# EAGLE board C6 (EAGLE 7.5.0)
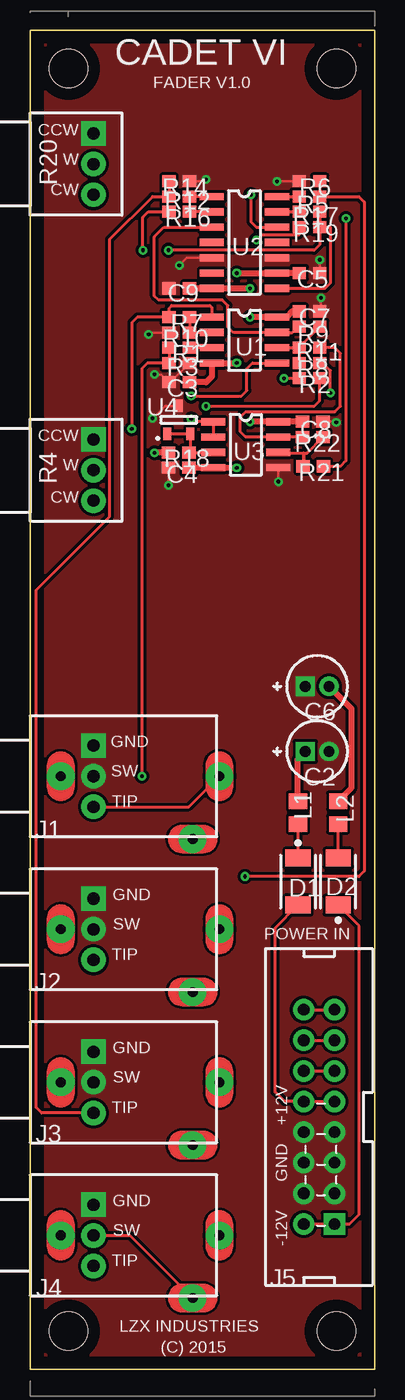
[diagram p0: board, top side]
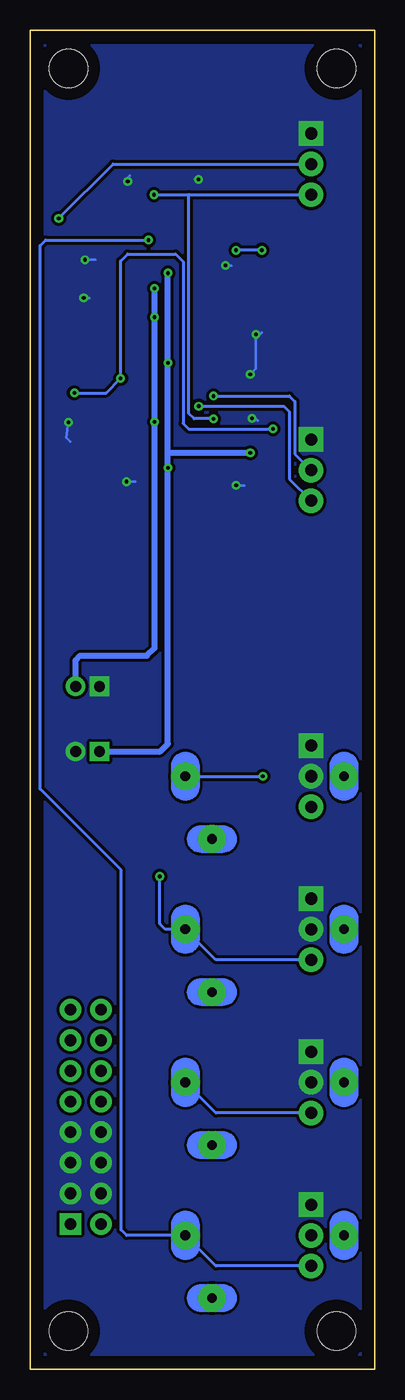
[diagram p1: board, bottom side, seen from below]

Size 28.57 x 111.14 mm. Coordinates in mm from the lower left corner, seen from the top.
Outline: 0,0.01 28.57,0 28.57,111.14 0,111.13 0,0.01
Copper layers (1*16): Top 0.035mm / dielectric 1.5mm / Bottom 0.035mm
Design rules "default *": minimum track width 10mil, minimum drill 0.61mm, track to track 8mil, track to pad 8mil, pad to pad 8mil, via to via 8mil, smd to smd 8mil, copper to edge 40mil, drill to drill 8mil, minimum pad ring 0mil, minimum via ring 8mil, stop-mask expansion 2mil, vias tented up to drill 12mil, thermal gap 10mil
Net classes: 0 Default: width 0.203 mm, clearance 0.203 mm, clearance 0.203 mm to class 1; 1 Power Rails: width 0.508 mm, clearance 0.203 mm, clearance 0.203 mm to class 0
Holes 3.17 mm at 3.17,3.18 3.17,107.96 25.4,3.18 53.02,123.36 25.4,107.96

## Footprints (pad centres in the part's own frame; a part is rotated, then mirrored left to right if it is on the bottom)
CAPPR-2/5.08 = drill 0.9 pad 1.6 square: 1 -0.991,0 | drill 0.9 pad 1.6: 2 0.991,0
CAP_0603 = smd 1.1 x 1: 1 -0.85,0; 2 0.85,0
CAP_0603_C5 = smd 1.1 x 1: 1 -0.85,0; 2 0.85,0
SMA = smd 1.4 x 2.1: 1 -1.95,0; 2 1.95,0
SMA_D2 = smd 1.4 x 2.1: 1 -1.95,0; 2 1.95,0
PJ302M = drill 0.8 pad 2.286: 1A 2.54,0; 2A 13.487,-5.207; 3A 15.697,0 | drill 1 pad 2.032 square: 1B 5.258,2.54 | drill 1 pad 2.032: 2B 5.258,0; 3B 5.258,-2.54
PJ302M_J4 = drill 0.8 pad 2.286: 1A 2.54,0; 2A 13.487,-5.207; 3A 15.697,0 | drill 1 pad 2.032 square: 1B 5.258,2.54 | drill 1 pad 2.032: 2B 5.258,0; 3B 5.258,-2.54
IDC16M = drill 0.965 pad 1.778 square: 1 8.89,1.27 | drill 0.965 pad 1.778: 2 8.89,-1.27; 3 6.35,1.27; 4 6.35,-1.27; 5 3.81,1.27; 6 3.81,-1.27; 7 1.27,1.27; 8 1.27,-1.27; 9 -1.27,1.27; 10 -1.27,-1.27; 11 -3.81,1.27; 12 -3.81,-1.27; 13 -6.35,1.27; 14 -6.35,-1.27; 15 -8.89,1.27; 16 -8.89,-1.27
RES_0805 = smd 1.3 x 1.5: 1 -0.95,0; 2 0.95,0
RES_0603 = smd 1.1 x 1: 1 -0.85,0; 2 0.85,0
RES_0603_R3 = smd 1.1 x 1: 1 -0.85,0; 2 0.85,0
ALPHA9H = drill 1 pad 2.032 square: 1 5.258,2.54 | drill 1 pad 2.032: 2 5.258,0; 3 5.258,-2.54
SOIC-8/150mil = smd 2 x 0.6: 1 -2.7,1.905; 2 -2.7,0.635; 3 -2.7,-0.635; 4 -2.7,-1.905; 5 2.7,-1.905; 6 2.7,-0.635; 7 2.7,0.635; 8 2.7,1.905
SOIC-14/150mil = smd 2 x 0.6: 1 -2.7,3.81; 2 -2.7,2.54; 3 -2.7,1.27; 4 -2.7,0; 5 -2.7,-1.27; 6 -2.7,-2.54; 7 -2.7,-3.81; 8 2.7,-3.81; 9 2.7,-2.54; 10 2.7,-1.27; 11 2.7,0; 12 2.7,1.27; 13 2.7,2.54; 14 2.7,3.81
SOT23 = smd 1.05 x 0.65: 1 -1.15,0.95; 2 -1.15,-0.95; 3 1.15,0

## Placement (x,y rotation side)
C2  10u 25V  [CAPPR-2/5.08]  23.81,51.28 0 top
C3  100n  [CAP_0603]  12.38,81.92 180 top
C4  100n  [CAP_0603]  12.33,74.83 180 top
C5  100n  [CAP_0603_C5]  23.17,90.97 0 top
C6  10u 25V  [CAPPR-2/5.08]  23.81,56.68 0 top
C7  100n  [CAP_0603]  23.17,87.8 180 top
C8  100n  [CAP_0603]  23.44,78.64 180 top
C9  100n  [CAP_0603_C5]  12.38,89.7 0 top
D1  B160-13-F  [SMA]  22.22,40.49 270 top
D2  B160-13-F  [SMA_D2]  25.55,40.49 90 top
J1  PJ302M  [PJ302M]  0,49.22 0 top
J2  PJ302M  [PJ302M]  0,36.52 0 top
J3  PJ302M  [PJ302M]  0,23.82 0 top
J4  PJ302M  [PJ302M_J4]  0,11.12 0 top
J5  EUROPWR16  [IDC16M]  23.97,20.96 270 top
L1  68R  [RES_0805]  22.22,46.2 90 top
L2  68R  [RES_0805]  25.55,46.2 90 top
R1  499R  [RES_0603]  12.38,84.78 0 top
R2  4.99K  [RES_0603]  23.17,82.24 0 top
R3  100K  [RES_0603_R3]  12.38,83.51 180 top
R4  B10K  [ALPHA9H]  0,74.62 0 top
R5  499R  [RES_0603_R3]  23.17,97.32 180 top
R6  100K  [RES_0603]  23.17,98.59 0 top
R7  1K  [RES_0603_R3]  12.38,87.32 180 top
R8  10K  [RES_0603_R3]  23.17,83.51 180 top
R9  10K  [RES_0603_R3]  23.17,86.53 180 top
R10  665R  [RES_0603]  12.38,86.05 0 top
R11  10K  [RES_0603_R3]  23.17,84.78 180 top
R12  499R  [RES_0603]  12.38,97.32 0 top
R14  100K  [RES_0603_R3]  12.38,98.59 180 top
R16  1.5K  [RES_0603]  12.38,96.05 0 top
R17  1.5K  [RES_0603]  23.17,96.05 0 top
R18  4.99K  [RES_0603_R3]  12.33,76.1 180 top
R19  499R  [RES_0603_R3]  23.17,94.78 180 top
R20  B10K  [ALPHA9H]  0,100.02 0 top
R21  10K  [RES_0603_R3]  23.49,74.94 180 top
R22  10K  [RES_0603_R3]  23.44,77.37 180 top
U1  LM6172IM/NOPB  [SOIC-8/150mil]  17.77,85.42 0 top
U2  LT1251CS  [SOIC-14/150mil]  17.77,93.51 0 top
U3  TL072D  [SOIC-8/150mil]  17.89,76.73 0 top
U4  TL431IPK  [SOT23]  12.33,78.8 90 top

## Library data of the parts
C2-C9 D1 D2 J5 L1 L2 R1-R3 R5-R12 R14 R16-R19 R21 R22 = common
J1-J4 = common; DATASHEET: http://www.thonk.co.uk/shop/pj302m/
R4 R20 = common; DATASHEET: http://www.thonk.co.uk/shop/alpha-9mm-pots/; MANUFACTURER: Alpha
U1 U3 = common; DATASHEET: http://www.ti.com/lit/gpn/lm6172; MANUFACTURER: Texas Instruments
U2 = common; DATASHEET: http://datasheets.diptrace.com\linear\LT1251_1256.pdf; MANUFACTURER: Linear
U4 = common; DATASHEET: http://datasheets.diptrace.com\ti\TL431.pdf; MANUFACTURER: Texas Instruments

## Nets
0V: C2.2 C3.2 C4.2 C5.2 C6.1 C7.1 C8.1 C9.1 J1.1A J1.1B J1.2A J1.2B J2.1A J2.1B J2.2A J2.2B J3.1A J3.1B J3.2A J3.2B J4.1A J4.1B J5.3 J5.4 J5.5 J5.6 J5.7 J5.8 R3.1 R4.1 R6.1 R10.1 R14.1 R20.1 U2.5 U2.10 U3.5 U4.3
+2.5V_Reference: R20.3 U2.12 U3.1 U3.2
+12V [Power Rails]: C2.1 C3.1 C4.1 C5.1 L1.2 R18.2 U1.4 U2.9 U3.4
-12V [Power Rails]: C6.2 C7.2 C8.2 C9.2 L2.2 U1.8 U2.7 U3.8
BIAS_CTRL_BUFFERED: R11.1 R22.2 U3.7
BUFFERED_VC_TO_FADER: R9.2 U1.7 U2.3
Net_0: J4.2A J4.2B
Net_1: D2.2 L2.1
Net_2: D1.1 L1.1
Net_3: J5.15 J5.16
Net_5: D2.1 J5.1 J5.2
Net_9: R1.2 U1.3
Net_11: R4.2 U1.5
Net_17: R2.2 R4.3
Net_28: R20.2 R21.1
Net_29: J5.11 J5.12
Net_30: J5.13 J5.14
Net_31: R5.2 U2.14
Net_32: R12.2 U2.1
Net_33: D1.2 J5.9 J5.10
Net_34: J4.3A J4.3B R19.2
Net_45: R16.1 R17.2 R19.1 U2.8
Net_46: R17.1 U2.13
Net_49: R16.2 U2.2
Net_50: R18.1 U3.3 U4.1 U4.2
Net_52: R7.1 R10.2 U1.2
Net_53: R2.1 R7.2 R8.1 U1.1
Net_54: R8.2 R9.1 R11.2 U1.6
Net_58: J1.3A J1.3B R1.1 R3.2
Net_60: R21.2 R22.1 U3.6
Net_63: J2.3A J2.3B R5.1 R6.2
Net_64: J3.3A J3.3B R12.1 R14.2

## Tracks (layer width: path | path; a pad name or v marks a point on that pad's centre or on a via)
0V  (via drill 0.3 pad 0.61)
  Top 0.203: C8.1 25.51,78.64 v25.4,78.59 | U3.5 v20.59,73.67 | U4.3 11.19,79.95 v10.15,78.91 | R10.1 10,86.05 v9.84,85.89 | C7.1 24.12,87.8 v24.12,88.91 | C5.2 v24.02,92.08 | U2.5 13.01,92.24 v12.38,91.61 | C4.2 v11.48,73.35 | R6.1 v20.47,98.59 | R14.1 14.44,98.59 v14.6,98.75 | v10.31,82.56 10.89,82.56 C3.2 11.64,81.92 R3.1
  Bottom 0.203: v25.4,78.59 25.55,77.32 25.24,77 | v20.59,73.67 19.84,73.67 | v10.15,78.91 9.84,78.91 9.68,78.75 | 9.36,86.05 9.52,85.89 v9.84,85.89 9.84,83.03 v10.31,82.56 | v24.12,88.91 23.65,88.91 | v24.02,92.08 23.17,92.08 | v12.38,91.61 11.9,91.61 | v11.48,73.35 10.79,73.35 | v20.47,98.59 20.47,98.91 20.32,99.07 | v14.6,98.75 14.92,98.75
  pour Top (isolate 0.254): 0.63,0.64 27.94,0.64 27.94,110.5 0.63,110.5
  pour Bottom (isolate 0.254): 0.63,0.64 27.94,0.64 27.94,110.5 0.63,110.5
+2.5V_Reference  (via drill 0.3 pad 0.61)
  Top 0.254: U3.2 U3.1 13.61,78.64 v13.37,78.88 | v18.31,97.48 18.31,95.24 18.76,94.78 U2.12
  Bottom 0.254: v13.37,78.88 14.97,78.88 15.39,79.31 15.39,97.48 | 15.39,97.48 R20.3 | v18.31,97.48 15.39,97.48
+12V  (via drill 0.3 pad 0.61)
  Top 0.508: C5.1 U2.9 v17.14,90.97 | C3.1 14.6,81.92 15.07,82.4 U1.4 v17.14,83.51 | C4.1 U3.4 v17.14,74.83 | L1.2 22.22,50.68 C2.1 | R18.2 10.36,76.1 v10.31,76.05
  Bottom 0.508: v17.14,90.97 v17.14,83.51 17.14,76.05 | 17.14,76.05 v17.14,74.83 17.14,51.92 17.77,51.28 C2.1 | v10.31,76.05 17.14,76.05
-12V  (via drill 0.3 pad 0.61)
  Top 0.508: C9.2 U2.7 v18.25,89.7 | U1.8 21.27,87.32 21.74,87.8 | 21.74,87.8 C7.2 21.74,87.8 | 21.74,87.8 21.27,87.32 v18.25,87.32 | C8.2 U3.8 | U3.8 | U3.8 v18.25,78.64 | L2.2 26.67,48.27 26.67,54.81 C6.2
  Bottom 0.508: v18.25,89.7 v18.25,87.32 v18.25,78.64 18.25,59.85 18.89,59.22 24.44,59.22 24.8,58.86 C6.2
BIAS_CTRL_BUFFERED
  Top 0.254: R22.2 U3.7 | U3.7 | U3.7 17.87,77.37 17.41,77.82 17.41,79.02 17.87,79.47 25.28,79.47 25.74,79.93 25.74,84.32 25.28,84.78 R11.1
BUFFERED_VC_TO_FADER
  Top 0.254: R9.2 22.22,86.53 21.74,86.05 U1.7 16.86,86.05 16.4,86.51 16.4,88.27 15.95,88.73 10.65,88.73 10.31,89.07 10.31,93.99 11.1,94.78 U2.3
Net_0
  Top 0.254: J4.2B 8.28,11.12 J4.2A
Net_1
  Top 0.254: D2.2 L2.1
Net_2
  Top 0.254: L1.1 D1.1
Net_3
  Top 0.254: J5.16 J5.15
Net_5
  Top 0.254: J5.2 J5.1 26.51,12.07 27.3,12.86 27.3,36.79 D2.1
Net_9
  Top 0.254: U1.3 R1.2 | R1.2
Net_11  (via drill 0.3 pad 0.61)
  Top 0.254: v13.37,80.77 17.52,80.77 17.98,81.23 17.98,83.05 18.44,83.51 U1.5
  Bottom 0.254: v13.37,80.77 7.06,80.77 6.6,80.31 6.6,75.97 R4.2
Net_17  (via drill 0.3 pad 0.61)
  Top 0.254: v14.58,79.93 23.57,79.93 24.02,80.39 R2.2
  Bottom 0.254: v14.58,79.93 7.52,79.93 7.06,79.47 7.06,73.88 R4.3
Net_28  (via drill 0.3 pad 0.61)
  Top 0.254: v26.2,95.52 26.2,75.39 25.74,74.94 R21.1
  Bottom 0.254: v26.2,95.52 21.69,100.02 R20.2
Net_29
  Top 0.254: J5.12 J5.11
Net_30
  Top 0.254: J5.14 J5.13
Net_31
  Top 0.254: U2.14 R5.2
Net_32
  Top 0.254: U2.1 R12.2
Net_33
  Top 0.254: J5.9 J5.10 21.11,22.23 20.32,23.02 20.32,36.63 D1.2
Net_34  (via drill 0.3 pad 0.61)
  Top 0.254: v18.76,93.71 19.2,94.14 22.32,94.14 R19.2
  Bottom 0.254: J4.3B 13.16,8.58 J4.3A 20.56,11.12 21.02,11.58 21.02,41.44 27.73,48.16 27.73,93.25 27.28,93.71 v18.76,93.71
Net_45  (via drill 0.3 pad 0.61)
  Top 0.254: R17.2 R19.1 | R19.1 24.02,93.33 23.57,92.87 v11.48,92.87 | v9.35,92.87 9.35,95.6 9.81,96.05 R16.1 | R19.1 24.9,94.78 24.9,90.16 24.45,89.7 U2.8
  Bottom 0.254: v9.35,92.87 v11.48,92.87
Net_46
  Top 0.254: U2.13 R17.1
Net_49
  Top 0.254: U2.2 R16.2
Net_50
  Top 0.254: U4.1 U4.2 13.28,76.2 R18.1 U3.3
Net_52
  Top 0.254: U1.2 R10.2 | R10.2 | R7.1 R10.2
Net_53  (via drill 0.3 pad 0.61)
  Top 0.254: U1.1 15.08,88.11 14.92,88.27 11.74,88.27 11.53,88.06 R7.2 8.89,87.32 8.43,86.86 v8.43,78.04 | v24.9,81.03 24.9,82.89 24.28,83.51 R8.1 | v21.06,82.24 R2.1
  Bottom 0.254: v24.9,81.03 22.27,81.03 v21.06,82.24 21.06,91.97 20.47,92.56 16.5,92.56 15.88,91.94 15.88,78.5 15.42,78.04 v8.43,78.04
Net_54
  Top 0.254: U1.6 R11.2 | R11.2 | R11.2 R8.2 | R11.2 22.54,84.78 22.22,84.46 22.22,84.72 R9.1
Net_58  (via drill 0.3 pad 0.61)
  Top 0.254: R1.1 R3.2 9.73,83.51 9.27,83.05 v9.27,49.22 | J1.3B 13.16,46.68 J1.3A
  Bottom 0.254: J1.3A v9.27,49.22
Net_60
  Top 0.254: U3.6 20.59,76.05 22.7,76.05 | 22.7,76.05 22.7,74.94 | 22.7,74.94 R21.2 22.7,74.94 | 22.7,74.94 22.7,76.05 | 22.7,76.05 22.98,76.05 R22.1
Net_63  (via drill 0.3 pad 0.61)
  Top 0.254: R6.2 R5.1 27.28,97.32 27.73,96.87 27.73,41.36 27.28,40.9 v17.82,40.9
  Bottom 0.254: J2.3B 13.16,33.98 J2.3A 17.36,36.52 17.82,36.98 v17.82,40.9
Net_64
  Top 0.254: R14.2 R12.1 10.15,97.32 6.6,93.77 6.6,70.77 0.5,64.66 0.5,21.74 0.95,21.28 J3.3B
  Bottom 0.254: J3.3B 13.16,21.28 J3.3A

## Text on the board
tPlace: CADET VI | FADER V1.0 | CCW | W | CW | R20 | R14 | R6 | R12 | R5 | R16 | R17 | R19 | U2 | C5 | C9 | C7 | R7 | R9 | R10 | R1 | U1 | R11 | R3 | R8 | C3 | R2 | U4 | CCW | C8 | R22 | W | U3 | R18 | R4 | C4 | R21 | CW | C6 | GND | SW | C2 | TIP | L1 | L2 | J1 | GND | D1 | D2 | SW | POWER IN | TIP | J2 | GND | SW | TIP | +12V | J3 | GND | GND | SW | -12V | TIP | J5 | J4 | LZX INDUSTRIES | (C) 2015
tDocu: R20 | R14 | R6 | R12 | R5 | R16 | R17 | R19 | U2 | C5 | C9 | C7 | R7 | R9 | R10 | R1 | U1 | R11 | R3 | R8 | C3 | R2 | U4 | C8 | R22 | U3 | R18 | R4 | C4 | R21 | C6 | C2 | L1 | L2 | J1 | D1 | D2 | J2 | J3 | J5 | J4